# EAGLE board rc2usb_5 (EAGLE 6.3)
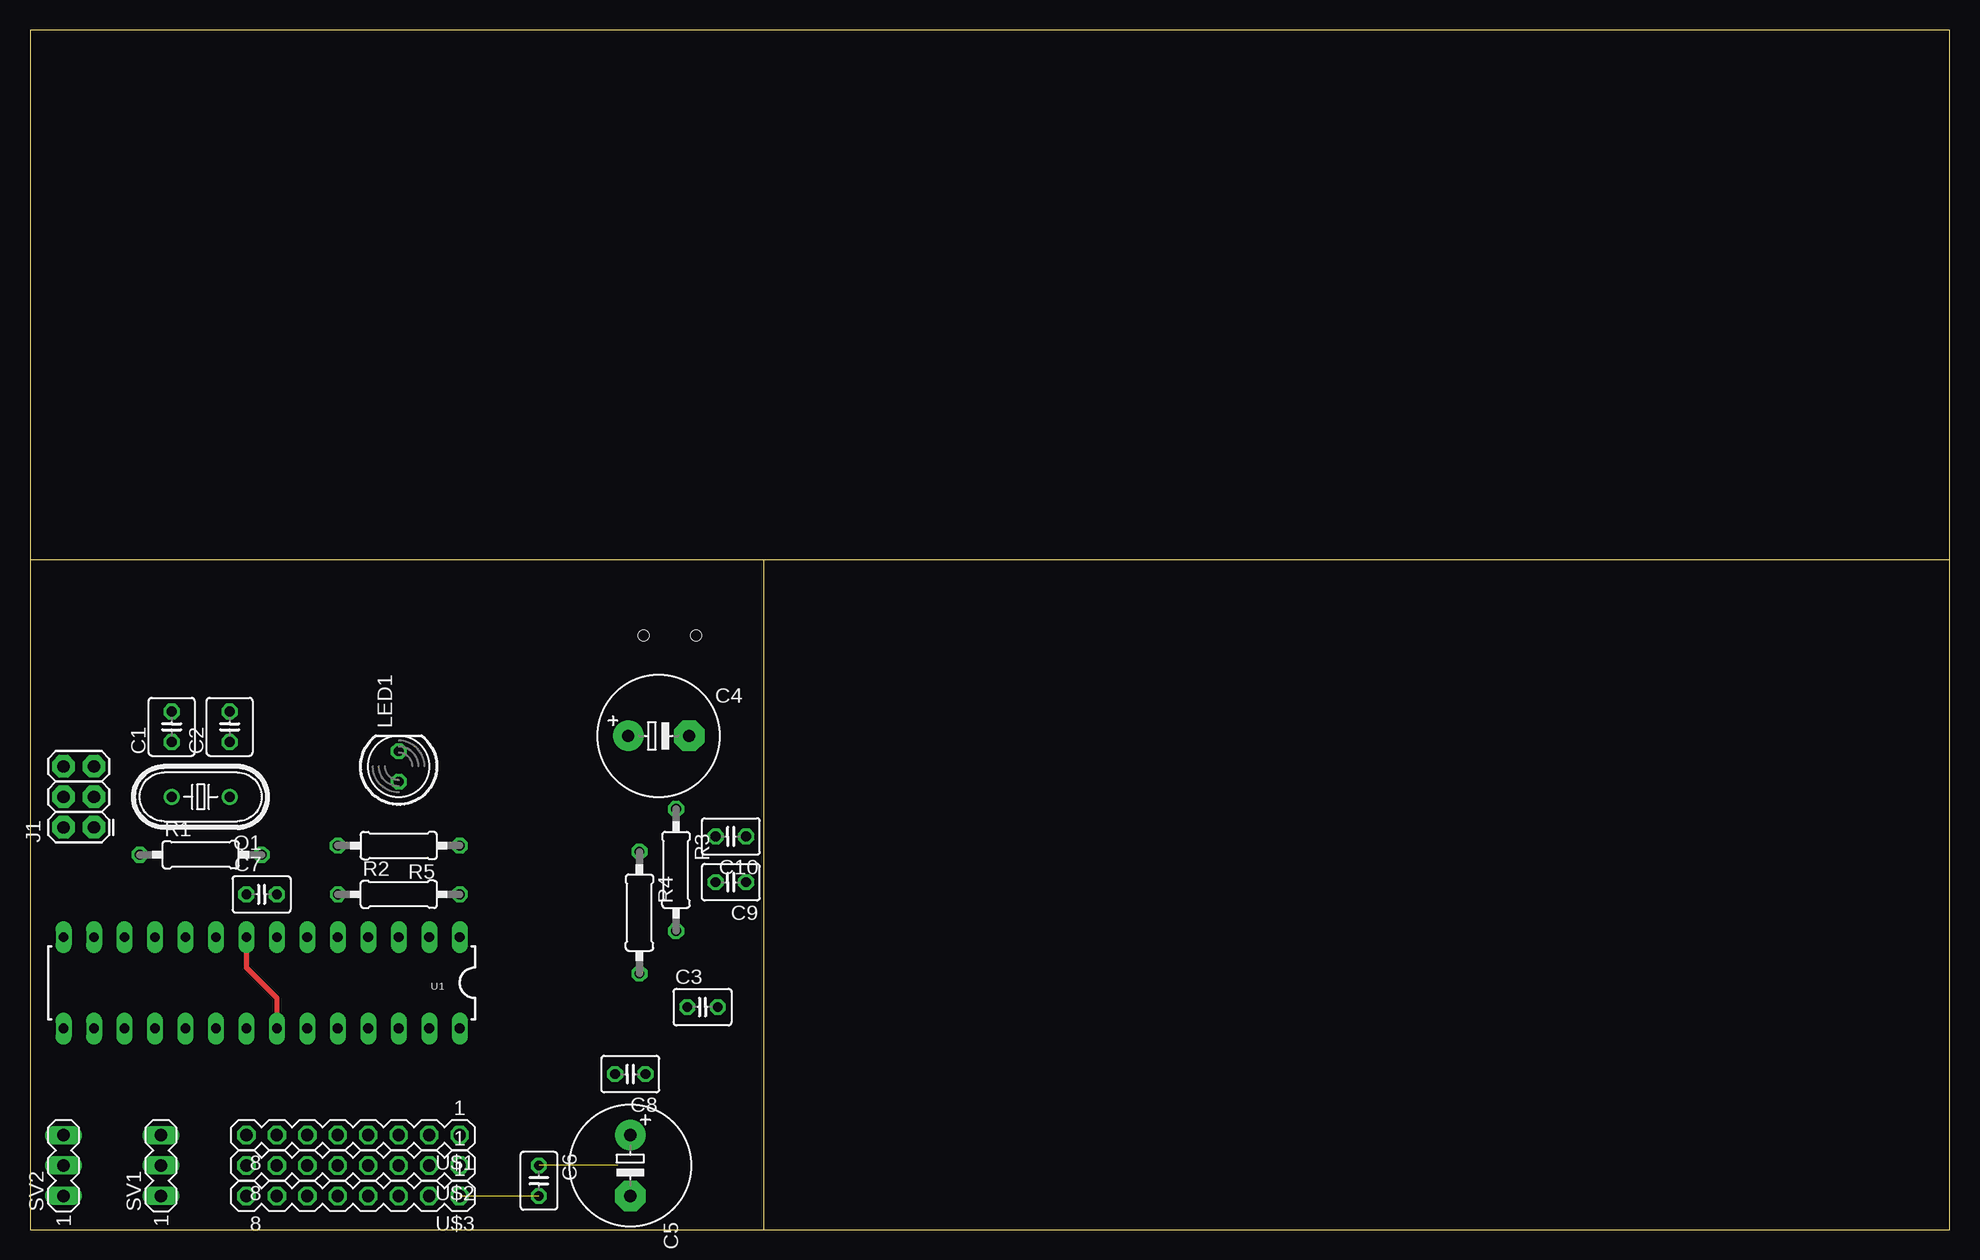
[diagram p0: board, top side]
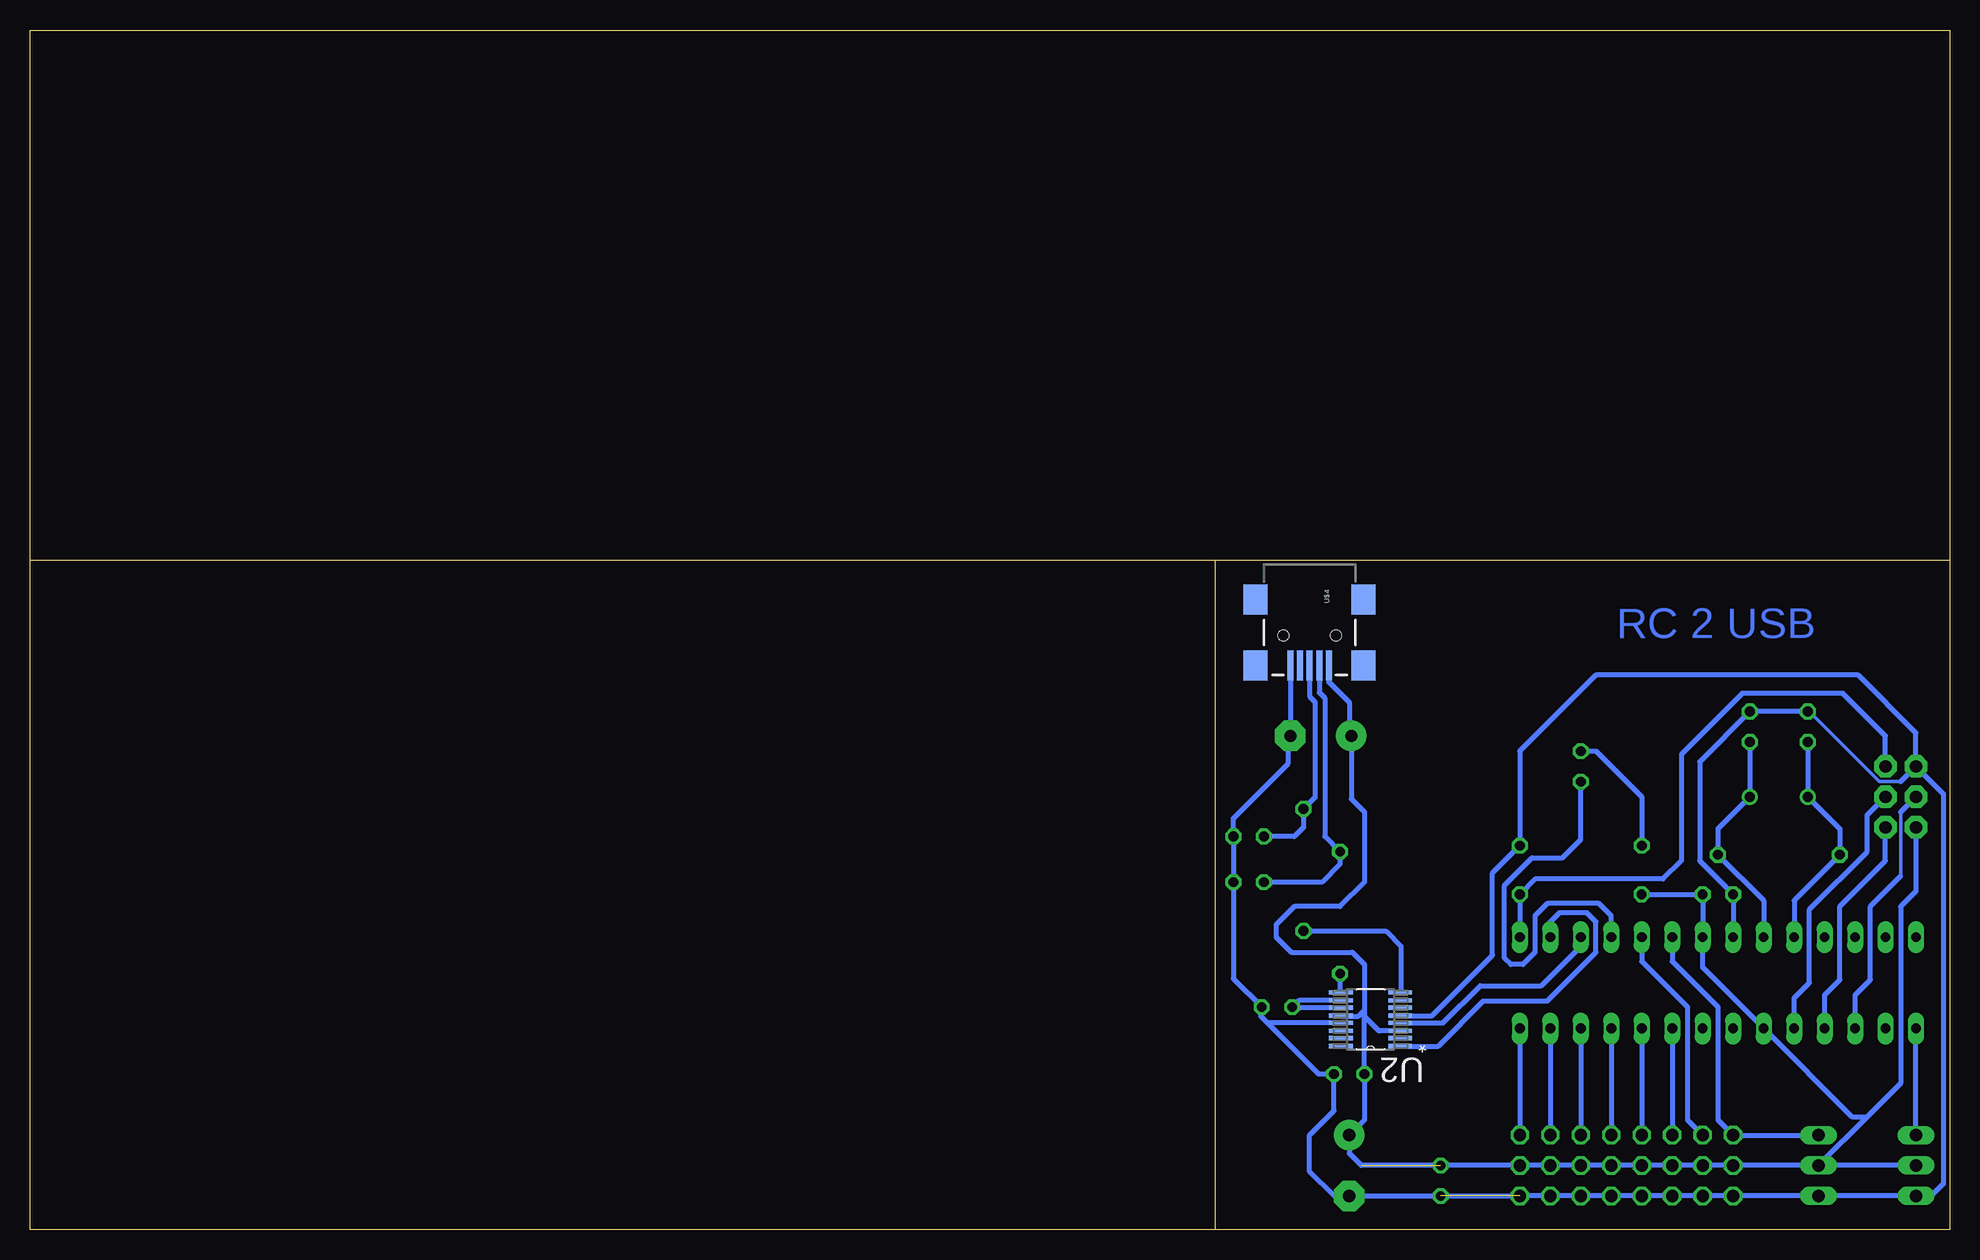
[diagram p1: board, bottom side, seen from below]

Size 160 x 100 mm. Coordinates in mm from the lower left corner, seen from the top.
Outline: 61.19,0 0,0 0,55.8
Outline: 61.19,0 160,0 160,0.25
Outline: 160,0.25 160,55.8
Outline: 160,55.8 160,56.06
Outline: 160,56.06 160,100 0,100 0,55.8
Outline: 160,55.8 61.19,55.8
Outline: 61.19,55.8 0,55.8
Outline: 160,0.25 160,56.06
Outline: 61.19,0 61.19,55.8
Copper layers (1*16): Top 0.035mm / dielectric 1.5mm / Bottom 0.035mm
Design rules "default": minimum track width 10mil, minimum drill 24mil, track to track 8mil, track to pad 8mil, pad to pad 8mil, via to via 8mil, smd to smd 8mil, copper to edge 40mil, drill to drill 8mil, minimum pad ring 10mil, minimum via ring 8mil, stop-mask expansion 4mil, vias tented up to drill 0mil, thermal gap 10mil

## Footprints (pad centres in the part's own frame; a part is rotated, then mirrored left to right if it is on the bottom)
C025-040X050 = drill 0.813 octagon: 1 -1.27,0; 2 1.27,0
C025-030X050 = drill 0.813 octagon: 1 -1.27,0; 2 1.27,0
E5-10,5 = drill 1.016 pad 2.54: + -2.54,0 | drill 1.016 pad 2.54 octagon: - 2.54,0
2X3 = drill 1.016 pad 1.88 octagon: 1 0,0; 2 0,2.54; 3 2.54,0; 4 2.54,2.54; 5 5.08,0; 6 5.08,2.54
LED5MM = drill 0.813 octagon: A -1.27,0; K 1.27,0
HC49U70 = drill 0.813: 1 -2.413,0; 2 2.413,0
0207/10 = drill 0.813 octagon: 1 -5.08,0; 2 5.08,0
MA03-1 = drill 1.016 long: 1 -2.54,0; 2 0,0; 3 2.54,0
DIL28-3 = drill 0.813 long: 1 -16.51,-3.81; 2 -13.97,-3.81; 3 -11.43,-3.81; 4 -8.89,-3.81; 5 -6.35,-3.81; 6 -3.81,-3.81; 7 -1.27,-3.81; 8 1.27,-3.81; 9 3.81,-3.81; 10 6.35,-3.81; 11 8.89,-3.81; 12 11.43,-3.81; 13 13.97,-3.81; 14 16.51,-3.81; 15 16.51,3.81; 16 13.97,3.81; 17 11.43,3.81; 18 8.89,3.81; 19 6.35,3.81; 20 3.81,3.81; 21 1.27,3.81; 22 -1.27,3.81; 23 -3.81,3.81; 24 -6.35,3.81; 25 -8.89,3.81; 26 -11.43,3.81; 27 -13.97,3.81; 28 -16.51,3.81
SOP63P600X175-16N = smd 1.981 x 0.356: 1 -2.464,2.235; 2 -2.464,1.575; 3 -2.464,0.965; 4 -2.464,0.305; 5 -2.464,-0.305; 6 -2.464,-0.965; 7 -2.464,-1.575; 8 -2.464,-2.235; 9 2.464,-2.235; 10 2.464,-1.575; 11 2.464,-0.965; 12 2.464,-0.305; 13 2.464,0.305; 14 2.464,0.965; 15 2.464,1.575; 16 2.464,2.235
HEADER_8_WAY = drill 1.016 octagon: 1 -8.89,0; 2 -6.35,0; 3 -3.81,0; 4 -1.27,0; 5 1.27,0; 6 3.81,0; 7 6.35,0; 8 8.89,0
USB-MINIB = smd 2.5 x 0.5: D+ 2.5,0; D- 2.5,0.8; GND 2.5,-1.6; ID 2.5,-0.8; VBUS 2.5,1.6 | smd 2.5 x 2: MTN1 -3,4.5; MTN2 2.5,4.5; MTN3 -3,-4.5; MTN4 2.5,-4.5 | hole 0.9: 0,2.2; 0,-2.2

## Placement (x,y rotation side)
C1  22p  [C025-040X050]  11.81,41.91 90 top
C2  22p  [C025-040X050]  16.64,41.91 90 top
C3  100nF  [C025-030X050]  56.06,18.54 0 top
C4  1000uF  [E5-10,5]  52.4,41.15 0 top
C5  1000uF  [E5-10,5]  50.04,5.33 270 top
C6  100nF  [C025-030X050]  42.42,4.06 270 top
C7  100nF  [C025-030X050]  19.3,27.94 0 top
C8  100nF  [C025-030X050]  50.04,12.95 180 top
C9  100nF  [C025-030X050]  58.42,28.96 180 top
C10  100nF  [C025-030X050]  58.42,32.77 180 top
J1  AVR_SPI_PRG_6PTH  [2X3]  5.33,33.53 90 top
LED1  [LED5MM]  30.73,38.61 90 top
Q1  16MHz  [HC49U70]  14.22,36.07 180 top
R1  1M  [0207/10]  14.22,31.24 0 top
R2  10k  [0207/10]  30.74,27.94 0 top
R3  27  [0207/10]  53.85,29.97 270 top
R4  27  [0207/10]  50.8,26.42 270 top
R5  680  [0207/10]  30.73,32 180 top
SV1  [MA03-1]  10.92,5.33 90 top
SV2  [MA03-1]  2.79,5.33 90 top
U1  ATMEGA328P_PDIP  [DIL28-3]  19.3,20.57 180 top
U2  FT230XS  [SOP63P600X175-16N]  48.26,17.53 180 bottom
U$1  HEADER_8_WAY  [HEADER_8_WAY]  26.92,7.87 180 top
U$2  HEADER_8_WAY  [HEADER_8_WAY]  26.92,5.33 180 top
U$3  HEADER_8_WAY  [HEADER_8_WAY]  26.92,2.79 180 top
U$4  USB-MINIB-5PIN  [USB-MINIB]  53.34,49.53 270 bottom

## Library data of the parts
C1 C2 R1-R5 = resistor
C3-C10 = rcl
J1 U$4 = SparkFun-Connectors
LED1 = led
Q1 = crystal; OC_FARNELL: unknown; OC_NEWARK: unknown
SV1 SV2 = con-lstb; OC_FARNELL: unknown; OC_NEWARK: unknown
U1 = SparkFun-DigitalIC
U2 = rc2usb; MPN: FT230XS; OC_FARNELL: 2081321; OC_NEWARK: 83T7087; PACKAGE: SSOP-16; SUPPLIER: FTDI
U$1-U$3 = rc2usb

## Nets
+5V: C4.+ C5.+ C6.1 C7.2 C8.2 J1.2 R2.1 SV1.2 SV2.2 U1.7 U1.20 U2.3 U2.12 U$2.1 U$2.2 U$2.3 U$2.4 U$2.5 U$2.6 U$2.7 U$2.8 U$4.VBUS
GND: C1.2 C2.2 C3.2 C4.- C5.- C6.2 C7.1 C8.1 C9.1 C10.1 J1.6 R5.1 SV1.1 SV2.1 U1.8 U1.22 U2.5 U2.13 U$3.1 U$3.2 U$3.3 U$3.4 U$3.5 U$3.6 U$3.7 U$3.8 U$4.GND
N$1: C2.1 Q1.1 R1.2 U1.9
N$2: C1.1 Q1.2 R1.1 U1.10
N$3: J1.4 U1.17
N$4: J1.1 U1.18
N$5: J1.3 U1.19
N$6: C10.2 R3.1 U$4.D+
N$7: C9.2 R4.1 U$4.D-
N$8: U1.24 U$1.5
N$9: R3.2 U2.8
N$10: LED1.A U1.4
N$11: C3.1 U2.10 U2.11
N$12: R4.2 U2.9
N$14: U1.25 U$1.4
N$15: U1.26 U$1.3
N$16: U1.23 U$1.6
N$17: U1.27 U$1.2
N$18: U1.28 U$1.1
N$19: U1.5 U$1.7
N$20: SV1.3 U1.6 U$1.8
N$22: SV2.3 U1.15
N$23: LED1.K R5.2
RESET: J1.5 R2.2 U1.1
RXD: U1.2 U2.1
TXD: U1.3 U2.4

## Tracks (layer width: path | path; a pad name or v marks a point on that pad's centre or on a via)
+5V  (1 unrouted)
  Bottom 0.406: SV2.2 SV1.2 | SV1.2 U$2.8 U$2.7 U$2.6 U$2.5 U$2.4 U$2.3 U$2.2 U$2.1 49.02,5.33 50.04,6.35 C5.+ 48.77,9.14 C8.2 48.77,17.78 | J1.2 2.79,28.19 4.06,26.92 4.06,12.19 6.86,9.4 | 6.86,9.4 SV1.2 | 6.86,9.4 8.13,9.4 U1.20 20.57,21.84 U1.7 C7.2 R2.1 | U$4.VBUS 51.74,45.64 50.04,43.94 50.04,41.33 C4.+ 49.86,35.89 48.77,34.8 48.77,28.96 50.8,26.92 54.61,26.92 56.13,25.4 56.13,24.38 54.86,23.11 49.78,23.11 48.77,22.1 48.77,18.29 | U2.3 47.55,16.56 48.77,17.78 | U2.12 50.67,17.78 49.28,17.78 48.77,18.29 | 48.77,18.29 48.77,17.78
GND  (1 unrouted)
  Top 0.406: U1.8 18.03,21.84 20.57,19.3 U1.22
  Bottom 0.305: 11.68,43.18 5.84,37.34 4.06,37.34
  Bottom 0.406: U1.8 C7.1 20.83,30.73 20.83,38.99 C2.2 C1.2 11.68,43.18 | U$4.GND C4.- | C4.- | J1.6 0.51,36.32 0.51,3.81 1.52,2.79 SV2.1 SV1.1 U$3.8 U$3.7 U$3.6 U$3.5 U$3.4 U$3.3 U$3.2 U$3.1 C5.- 51.31,2.79 53.34,4.83 53.34,7.87 51.31,9.91 C8.1 52.58,12.95 56.84,17.22 | J1.6 2.79,41.4 7.62,46.23 29.46,46.23 35.81,39.88 R5.1 38.1,29.72 38.1,22.86 43.13,17.83 U2.5 | 4.06,37.34 J1.6 | C4.- 55.12,40.97 55.12,38.86 59.69,34.29 C10.1 C9.1 59.69,20.9 C3.2 | C3.2 57.33,18.36 57.4,18.29 | U2.13 56.84,17.22 | 56.84,17.22 57.02,17.4 57.4,17.78 57.4,18.47 C3.2
N$1
  Bottom 0.406: U1.9 15.49,27.43 R1.2 19.3,33.4 Q1.1 C2.1
N$2
  Bottom 0.406: U1.10 12.95,27.43 R1.1 9.14,33.4 Q1.2 C1.1
N$3
  Bottom 0.305: 4.06,29.46 4.06,34.8
  Bottom 0.406: U1.17 7.87,19.56 6.6,20.83 6.6,26.92 4.06,29.46 | 4.06,34.8 J1.4
N$4
  Bottom 0.406: U1.18 10.41,19.56 9.14,20.83 9.14,26.92 5.33,30.73 J1.1
N$5
  Bottom 0.406: U1.19 12.95,19.3 11.68,20.57 11.68,26.67 6.86,31.5 6.86,34.54 J1.3
N$6
  Bottom 0.406: U$4.D+ 53.34,44.45 52.88,43.97 52.88,36.02 R3.1 53.85,33.53 54.61,32.77 C10.2
N$7
  Bottom 0.406: U$4.D- 52.54,44.77 52.07,44.3 52.07,32.77 R4.1 50.8,30.48 52.32,28.96 C9.2
N$8
  Bottom 0.406: U1.24 U$1.5
N$9
  Bottom 0.406: R3.2 46.99,24.89 45.72,23.62 45.72,19.84 U2.8
N$10
  Bottom 0.406: U1.4 28.19,26.16 29.21,27.18 33.53,27.18 34.54,26.16 34.54,23.11 35.56,22.1 36.58,22.1 37.08,22.61 37.08,28.7 34.8,30.99 32.26,30.99 30.73,32.51 LED1.A
N$11
  Bottom 0.406: U2.11 54.74,18.49 C3.1 54.23,19.1 U2.10
N$12
  Bottom 0.406: R4.2 50.8,19.84 U2.9
N$14
  Bottom 0.406: U1.25 U$1.4
N$15
  Bottom 0.406: 30.73,17.02 U1.26 U$1.3
N$16
  Bottom 0.406: U1.23 U$1.6
N$17
  Bottom 0.406: U1.27 U$1.2
N$18
  Bottom 0.406: U1.28 U$1.1
N$19
  Bottom 0.406: U1.5 25.65,22.35 21.84,18.54 21.84,9.14 U$1.7
N$20
  Bottom 0.406: U1.6 23.11,22.35 19.3,18.54 19.3,9.14 U$1.8 SV1.3
N$22
  Bottom 0.406: SV2.3 U1.15
N$23
  Bottom 0.406: LED1.K 29.46,39.88 25.65,36.07 R5.2
RESET
  Bottom 0.406: U1.1 R2.2 34.55,29.21 23.88,29.21 22.35,30.73 22.35,39.62 17.27,44.7 8.89,44.7 5.33,41.15 J1.5
RXD
  Bottom 0.406: U1.2 33.27,25.65 32.51,26.42 30.23,26.42 29.46,25.65 29.46,23.11 33.53,19.05 38.86,19.05 42.62,15.29 U2.1
TXD
  Bottom 0.406: U1.3 30.73,23.62 34.04,20.32 39.12,20.32 42.22,17.22 U2.4

## Text on the board
Bottom: RC 2 USB